# Altium PCB NBP-28 Rev 1.00.PCBDOC (part 6 of 6)
Units mil, origin at the board's own origin, x right, y up, seen from the top; angles counter-clockwise.
Board outline 2716.54 x 3917.15 mil, 8 copper layers (Top Layer, MidLayer3, MidLayer1, VCC, Gnd, VCCINT, MidLayer2, Bottom Layer), stack 59.043 mil thick; 229 components, 429 nets, 1584 pads, 1020 vias.
Unrouted connection lines stored in the file: 302.
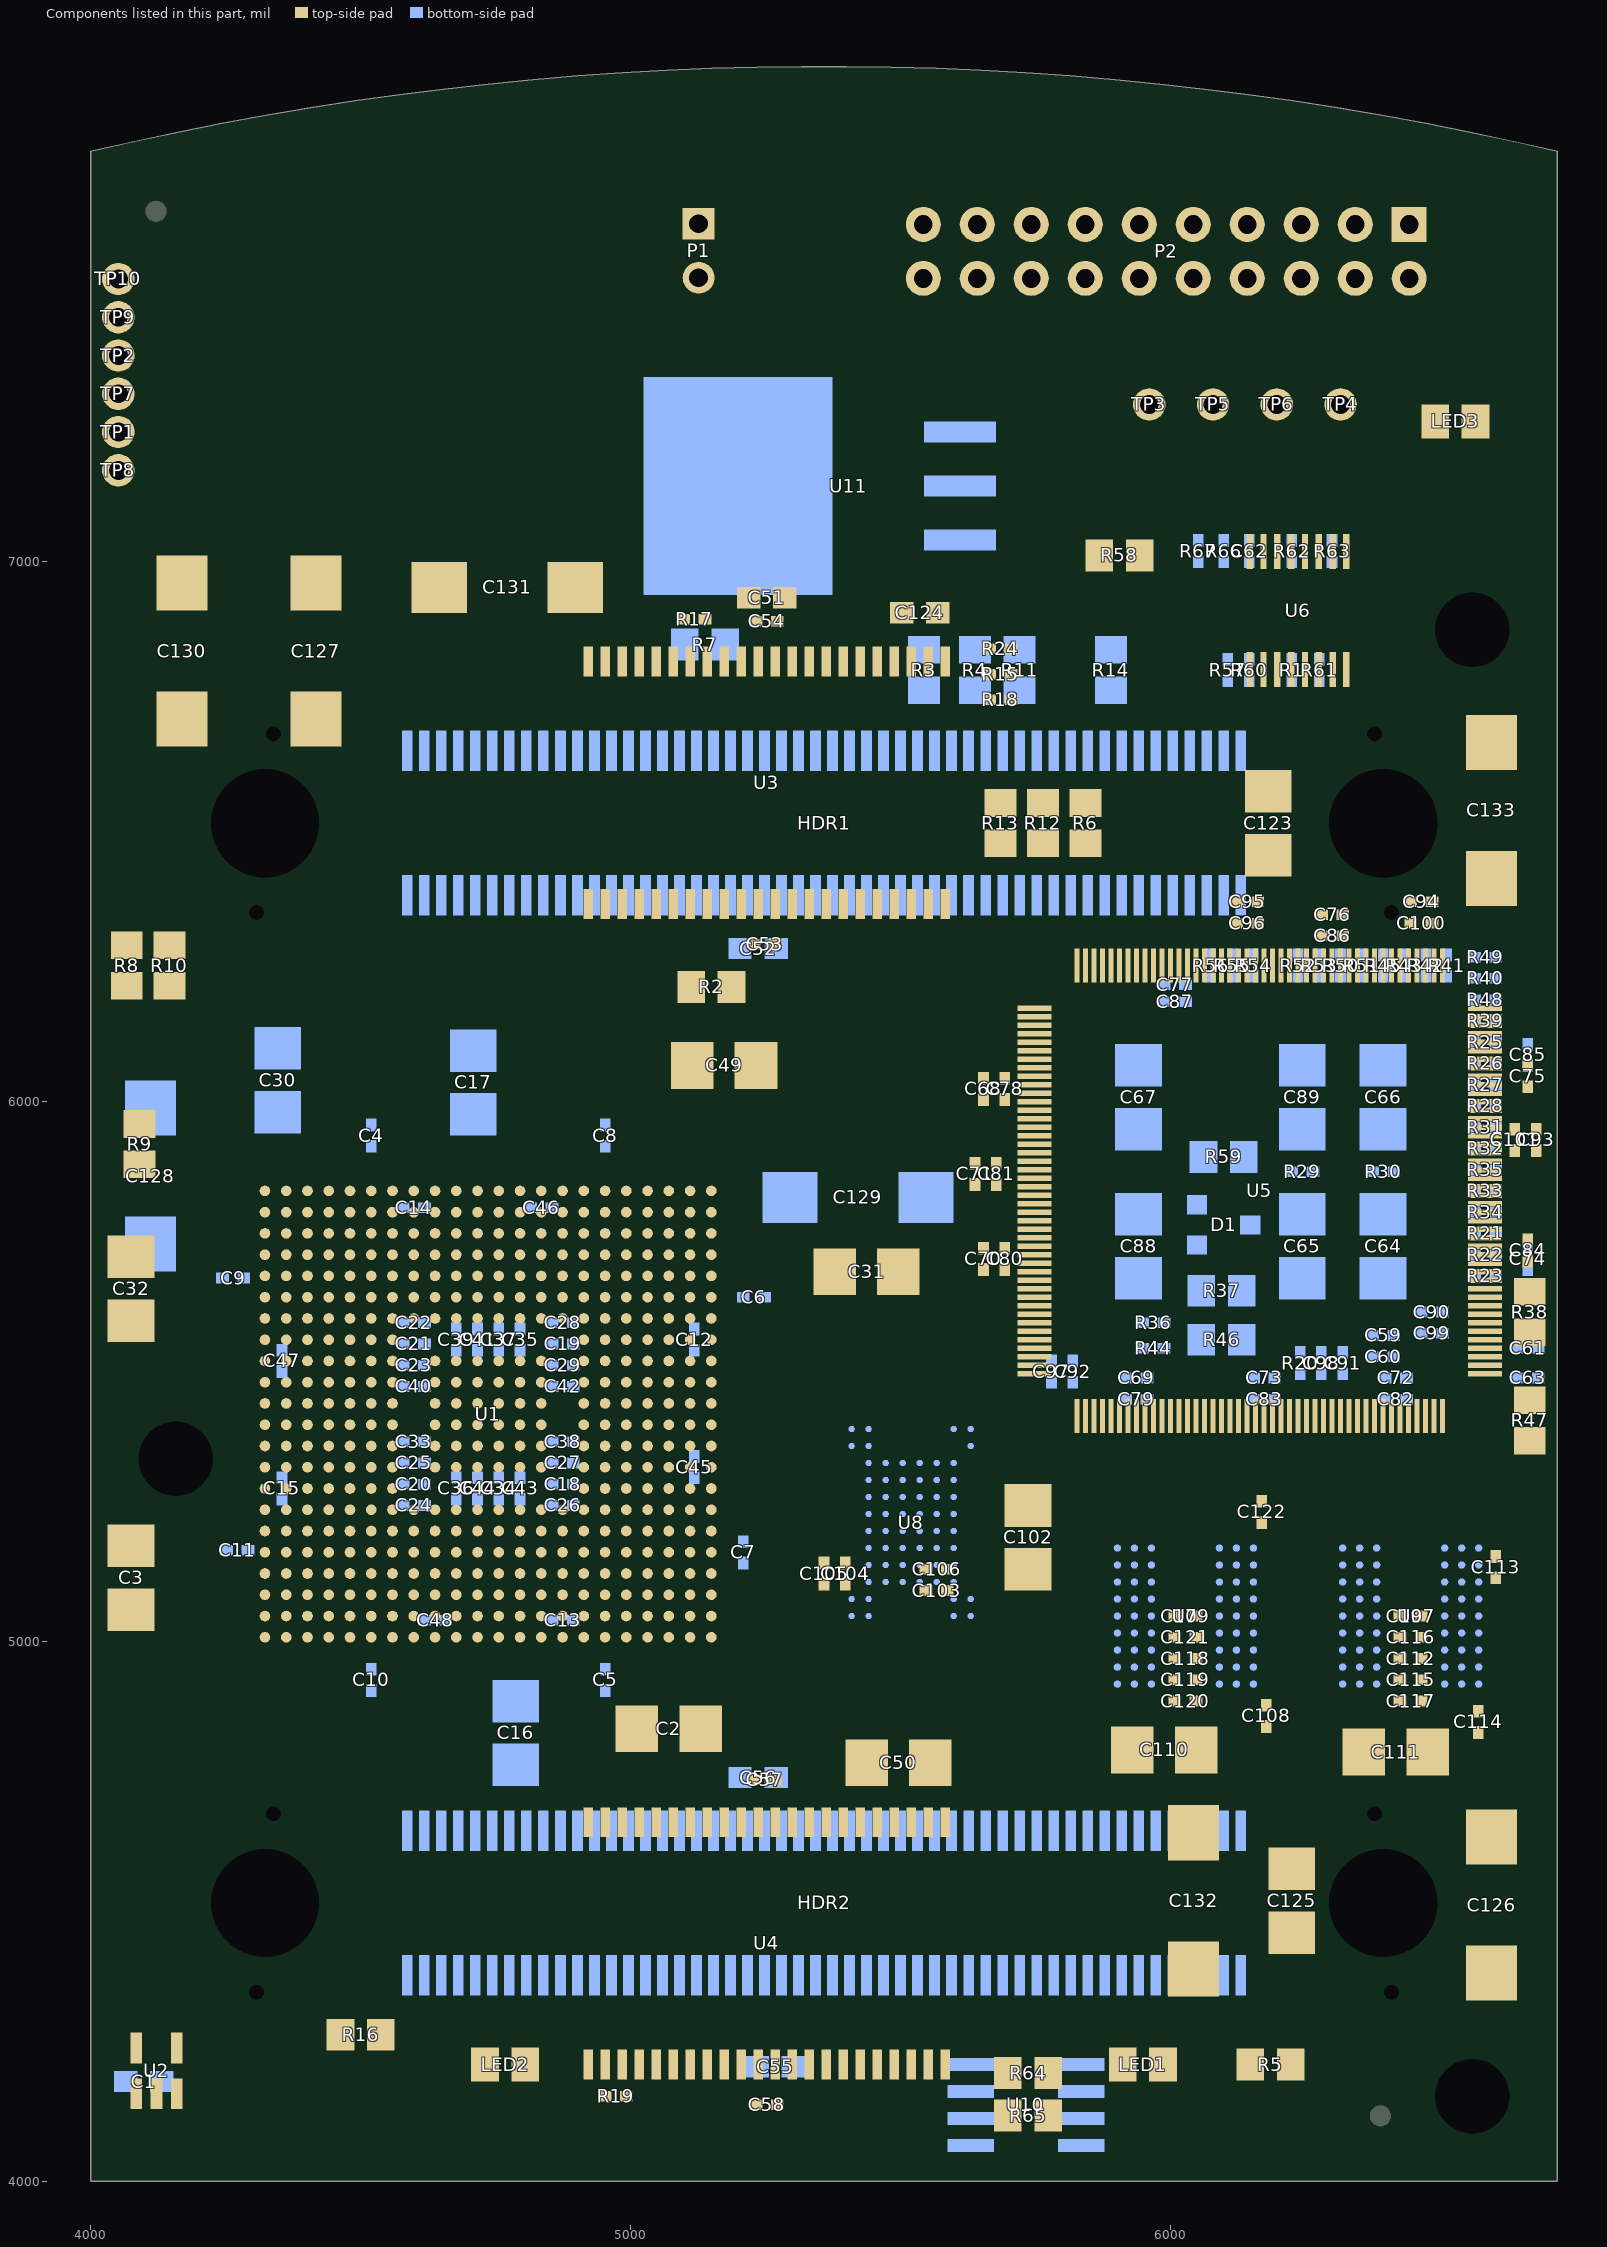
[diagram p12: the components of this part, seen from the top]

## Silkscreen, mask and mechanical layers (free items; w line width, h text height) (continued)
Design Information:
  drawing of 689 lines, arcs and shapes, not listed
  text "NBP28 Rev1.00" at 13407.17,10976.02 h50
  text "DESIGN INFORMATION" at 11202.17,10971.02 h60
  text "BOARD NAME:" at 12682.17,10971.02 h60
  text "BOARD TECHNOLOGY" at 11202.17,10871.02 h60
  text "BOARD SIZE (REFER ALSO PROFILING INFORMATION)" at 13102.17,10871.02 h50
  text "5.000" at 11285.67,10784.84 h60
  text "69.00mm" at 13209.25,10781.5 h60
  text "12.000" at 11821.8,10778.89 h60
  text "81.00mm" at 14114.76,10777.56 h60
  text "5.000" at 12374.17,10773.03 h60
  text "X" at 13837.17,10751.02 h70
  text "(MIN. TRACK/   PADS  /   CLEARANCE     IN 0.001'')" at 11142.17,10671.02 h50
  text "MINIMUM ANNULAR RING 0.125MM (0.005'') EXTERNAL PER IPC-2221 CLASS 3 LEVEL C AND IS THE" at 11202.17,10571.02 h50
  text "MANUFACTURING REGISTRATION ALLOWANCE" at 11202.17,10481.02 h50
  text "LAND SIZE CALCULATION MINIMUM - NOMINAL HOLE SIZE + 0.508MM (0.020'')" at 11202.17,10371.02 h50
  text "CIRCUIT TYPE:" at 11202.17,10191.02 h60
  text "SS" at 12102.17,10191.02 h50
  text "DS" at 12802.17,10191.02 h50
  text "X" at 13377.17,10191.02 h60
  text "PTH" at 13502.17,10191.02 h50
  text "ML" at 13932.17,10191.02 h50
  text "X" at 14082.17,10191.02 h60
  text "No. OF" at 14202.17,10191.02 h50
  text "8" at 14885.67,10184.84 h60
  text "FINGER CONNECTOR DIM PER:" at 11202.17,10071.02 h60
  text "AS SHOWN" at 14202.17,10071.02 h50
  text "No. OFF TOTAL" at 11862.17,9961.02 h60
  text "ONE SIDE" at 13502.17,9961.02 h50
  text "BOTH SIDES" at 14202.17,9951.02 h50
  text "VIAS:" at 11202.17,9846.02 h60
  text "NONE" at 11652.17,9846.02 h45
  text "X" at 11982.17,9846.02 h60
  text "FEED THRU'" at 12102.17,9846.02 h45
  text "TENTED" at 12802.17,9846.02 h45
  text "BURIED LAYER SEQUENCE" at 13502.17,9846.02 h45
  text "UNIQUE DRILL" at 12102.17,9726.02 h45
  text "2 SIZE" at 12802.17,9726.02 h45
  text "BLIND LAYER SEQUENCE" at 13502.17,9726.02 h45
  text "Layer Stack Manager (Protel)" at 12597.17,9636.02 h50
  text "X" at 14082.17,9636.02 h60
  text "AS SHOWN" at 14202.17,9636.02 h50
  text "LAYER CONSTRUCTION PER:" at 11202.17,9631.02 h60
  text "Protel" at 14392.17,9531.02 h50
  text "(PFW)" at 14797.17,9526.02 h50
  text "ARTWORK:" at 11202.17,9521.02 h60
  text "MANUAL" at 12102.17,9521.02 h50
  text "DIGITISED" at 12802.17,9521.02 h50
  text "X" at 13382.17,9521.02 h60
  text "CAD" at 13502.17,9521.02 h50
  text "TYPE" at 13932.17,9521.02 h50
  text "ARTWORK/PATTERN MASTER LIST" at 11202.17,9336.02 h60
  text "DESCRIPTION" at 11252.17,9241.02 h50
  text "DRAWING No./CAD FILE REF." at 11987.17,9241.02 h50
  text "LAYER NAME" at 13612.17,9241.02 h50
  text "GERBER FILE REF" at 14429.17,9238.03 h50
  text "PCB FILE" at 11192.17,9141.02 h50
  text "NBP28 Rev1.00" at 11993.7,9138.78 h50
  text "PcbDoc" at 13224.17,9138.03 h40
  text "Top Paste Mask" at 13546.18,9041.02 h40
  text "GTP" at 15224.17,9038.03 h50
  text "GERBER FILE" at 11192.17,9036.02 h50
  text "GTO" at 15222.17,8940.04 h50
  text "Top Overlay" at 13546.18,8939.02 h40
  text "GERBER FILE" at 11192.17,8936.02 h50
  text "Top Solder Mask" at 13546.18,8843.03 h40
  text "GTS" at 15224.17,8838.03 h50
  text "GERBER FILE" at 11192.17,8836.02 h50
  text "TOP LAYER" at 13546.18,8741.02 h40
  text "GTL" at 15224.17,8738.03 h50
  text "GERBER FILE" at 11192.17,8736.02 h50
  text "MIDLAYER3" at 13546.21,8641.09 h40
  text "G3" at 15219.43,8641.09 h50
  text "GERBER FILE" at 11192.17,8636.02 h50
  text "MIDLAYER1" at 13546.21,8542.67 h40
  text "G1" at 15219.43,8542.67 h50
  text "GERBER FILE" at 11192.17,8536.02 h50
  text "VCC" at 13546.18,8441.02 h40
  text "GERBER FILE" at 11192.17,8436.02 h50
  text "GP2" at 15224.17,8431.73 h50
  text "GND" at 13546.21,8345.82 h40
  text "GP1" at 15219.43,8345.82 h50
  text "GERBER FILE" at 11192.17,8336.02 h50
  text "VCCINT" at 13546.21,8247.39 h40
  text "GERBER FILE" at 11192.17,8236.02 h50
  text "GP3" at 15224.17,8234.88 h50
  text "MIDLAYER2" at 13546.21,8148.97 h40
  text "GERBER FILE" at 11192.17,8136.02 h50
  text "G2" at 15224.17,8136.46 h50
  text "BOTTOM LAYER" at 13546.18,8041.02 h40
  text "GBL" at 15224.17,8038.03 h50
  text "GERBER FILE" at 11192.17,8036.02 h50
  text "Bottom Solder Mask" at 13546.18,7943.03 h40
  text "GBS" at 15224.17,7938.03 h50
  text "GERBER FILE" at 11192.17,7936.02 h50
  text "Bottom Overlay" at 13546.18,7841.02 h40
  text "GBO" at 15224.17,7838.03 h50
  text "GERBER FILE" at 11192.17,7836.02 h50
  text "Bottom Paste Mask" at 13546.18,7743.03 h40
  text "GBP" at 15224.17,7738.03 h50
  text "GERBER FILE" at 11192.17,7736.02 h50
  text "PCB Boundary" at 13546.18,7641.02 h40
  text "GM1" at 15224.17,7638.03 h50
  text "GERBER FILE" at 11192.17,7636.02 h50
  text "Dimensions" at 13546.18,7541.02 h40
  text "GM4" at 15224.17,7538.03 h50
  text "GERBER FILE" at 11192.17,7536.02 h50
  text "APERTURE LIST" at 11192.17,7441.02 h50
  text "APR" at 13263.54,7438.03 h50
  text "DRILL REPORT" at 11192.17,7341.02 h50
  text "DRR" at 13263.54,7338.03 h50
  text "DRILL FILE" at 11181.69,7238.39 h50
  text "DRL" at 13258.62,7232.72 h50
  text "TXT" at 13252.56,7137.99 h50
  text "EXCELLON DRILL" at 11178.74,7135.04 h50
  text "MATERIAL:" at 11202.17,6931.02 h60
  text "GLASS FIBRE EPOXY RESIN NEMA GRADE FR4 (MIL-S-13949H)" at 12212.17,6921.02 h50
  text "X" at 12107.17,6916.02 h60
  text "THICKNESS:" at 11512.17,6806.02 h50
  text "0.8mm" at 12212.17,6806.02 h50
  text "1.2mm" at 12907.17,6806.02 h50
  text "1.6mm" at 13602.17,6806.02 h50
  text "2.4mm" at 14302.17,6806.02 h50
  text "3.2mm" at 15002.17,6806.02 h50
  text "X" at 13507.17,6801.02 h60
  text "TOLERANCE:" at 11507.17,6686.02 h50
  text "IN A/W IPC-D-300G CLASS" at 12202.17,6686.02 h50
  text "3 LEVEL B" at 13577.17,6686.02 h50
  text "OTHER +/-" at 14302.17,6686.02 h50
  text "X" at 12107.17,6681.02 h60
  text "BOW & TWIST:" at 11412.17,6566.02 h50
  text "IN A/W IPC-D-300G CLASS" at 12202.17,6566.02 h50
  text "3 LEVEL B" at 13577.17,6566.02 h50
  text "AS SHOWN" at 14307.17,6561.02 h50
  text "X" at 12107.17,6556.02 h60
  text "COPPER THICKNESS (FINISHED)" at 11507.17,6436.02 h50
  text "OUTER:" at 11697.17,6346.02 h50
  text "18um" at 12212.17,6346.02 h50
  text "35um" at 13277.17,6346.02 h50
  text "70um" at 14312.17,6346.02 h50
  text "X" at 13169.17,6338.03 h60
  text "INNER SIGNAL:" at 11367.17,6226.02 h50
  text "18um" at 12212.17,6226.02 h50
  text "35um" at 13277.17,6226.02 h50
  text "70um" at 14312.17,6226.02 h50
  text "X" at 13167.17,6218.03 h60
  text "INNER PWR:" at 11512.17,6106.02 h50
  text "18um" at 12212.17,6106.02 h50
  text "35um" at 13277.17,6106.02 h50
  text "70um" at 14312.17,6106.02 h50
  text "X" at 13172.17,6101.02 h60
  text "STRUCTURE:" at 11202.17,5986.02 h60
  text "REFER" at 12212.17,5986.02 h50
  text "AS PER DRAWING No." at 12207.17,5861.02 h50
  text "AS SHOWN" at 14307.17,5861.02 h50
  text "X" at 14207.17,5856.02 h60
  text "DRILLING:" at 11202.17,5751.02 h60
  text "VIEWED FROM:" at 11397.17,5661.02 h50
  text "COMPONENT SIDE" at 12212.17,5661.02 h45
  text "SOLDER SIDE" at 13267.17,5661.02 h45
  text "X" at 12107.17,5651.02 h60
  text "REFERENCE:" at 11487.17,5541.02 h50
  text "AS SHOWN" at 12207.17,5536.02 h45
  text "PATTERN MASTER LIST" at 13272.17,5536.02 h45
  text "X" at 14207.17,5536.02 h60
  text "NC_DRILL FILES" at 14307.17,5536.02 h45
  text "X" at 12107.17,5531.02 h60
  text "PTH MINIMUM COPPER THICKNESS:" at 11717.17,5421.02 h50
  text "20um" at 13277.17,5421.02 h50
  text "X" at 13172.17,5416.02 h60
  text "OTHER" at 14307.17,5416.02 h50
  text "NPTH:" at 11737.17,5301.02 h50
  text "TENTED" at 12207.17,5296.02 h45
  text "X" at 13172.17,5296.02 h60
  text "PADS REMOVED" at 13272.17,5296.02 h45
  text "REMOVE PADS" at 14307.17,5296.02 h45
  text "X" at 12107.17,5291.02 h60
  text "2nd DRILL" at 12207.17,5176.02 h45
  text "BOTH" at 13272.17,5176.02 h45
  text "AS SHOWN" at 13757.17,5176.02 h45
  text "NONE" at 14307.17,5176.02 h45
  text "BOARD FINISH:" at 11202.17,5061.02 h60
  text "X" at 12107.17,5056.02 h60
  text "ETCHING" at 12207.17,5056.02 h45
  text "REFER PATTERN MASTER LIST" at 13272.17,5056.02 h45
  text "LEGEND / SCREEN PRINT:" at 12002.17,4941.02 h50
  text "NONE" at 13272.17,4936.02 h45
  text "COMPONENT" at 13757.17,4936.02 h45
  text "SOLDER" at 14307.17,4936.02 h45
  text "X" at 13657.17,4931.02 h60
  text "X" at 14207.17,4931.02 h60
  text "COLOUR:" at 11617.17,4821.02 h50
  text "WHITE" at 12207.17,4816.02 h45
  text "YELLOW" at 13272.17,4816.02 h45
  text "OTHER" at 14307.17,4816.02 h45
  text "X" at 12107.17,4811.02 h60
  text "X" at 12107.17,4696.02 h60
  text "LIQUID PHOTOIMAGEABLE" at 12207.17,4696.02 h45
  text "SCREEN PRINT" at 13757.17,4696.02 h45
  text "MATTE" at 12207.17,4576.02 h45
  text "GLOSS" at 12707.17,4576.02 h45
  text "GREEN" at 13272.17,4576.02 h45
  text "BLUE" at 13757.17,4576.02 h45
  text "G/Y" at 14307.17,4576.02 h45
  text "OTHER" at 14757.17,4576.02 h45
  text "X" at 12602.17,4571.02 h60
  text "SOLDER MASK COLOUR:" at 11202.17,4461.02 h45
  text "BLACK" at 12207.17,4456.02 h45
  text "GREEN" at 12707.17,4456.02 h45
  text "YELLOW" at 13272.17,4456.02 h45
  text "BLUE" at 13757.17,4456.02 h45
  text "OTHER" at 14307.17,4456.02 h45
  text "X" at 12102.17,4451.02 h60
  text "TRACK FINISH:" at 11202.17,4341.02 h60
  text "SELECTIVE SOLDER (HASL)" at 12207.17,4336.02 h45
  text "REFLOW SOLDER" at 13757.17,4336.02 h45
  text "SELECTIVE GOLD" at 12207.17,4216.02 h45
  text "um  (AREA" at 13272.17,4216.02 h45
  text "sq. mm)" at 14367.17,4216.02 h45
  text "X" at 12101.97,4096.46 h60
  text "IMMERSION GOLD" at 12207.17,4096.02 h45
  text "OTHER" at 13757.17,4096.02 h45
  text "EDGE BOARD" at 11202.17,3981.02 h60
  text "1.3um HARD GOLD OVER 5um     NICKEL / TIN-NICKEL" at 12207.17,3976.02 h45
  text "CONTACTS:" at 11202.17,3896.02 h60
  text "HARD FINISH GOLDE PLATE" at 12207.17,3856.02 h45
  text "OTHER" at 13757.17,3856.02 h45
  text "AS SHOWN" at 12207.17,3736.02 h45
  text "REFER" at 13757.17,3736.02 h45
  text "PROFILING:" at 11202.17,3616.02 h60
  text "AS DIMENSIONED, MEASURED AND CUT FROM SPECIFIED DATUM." at 12207.17,3616.02 h45
  text "X" at 12107.17,3611.02 h60
  text "REFER PCB BLANK DWG No." at 12212.17,3501.02 h50
  text "USE PROFILE / ROUTE TAPE SUPPLIED (REFER PATTERN MASTER LIST)" at 12212.17,3381.02 h50
  text "SQUARE CUT" at 12212.17,3261.02 h50
  text "N.C. ROUTE" at 12912.17,3261.02 h50
  text "V. SCORE" at 13612.17,3261.02 h50
  text "BLANK" at 14312.17,3261.02 h50
  text "ACCEPTABILITY:" at 11202.17,3156.02 h60
  text "MATERIALS AND WORKMANSHIP FOR ALL PRINTED WIRING BOARDS TO MEET" at 12077.17,3151.02 h50
  text "OR EXCEED THE REQUIREMENTS OF:" at 12077.17,3041.02 h50
  text "IPC-6011/12 AND IPC-A-600E" at 12217.17,2936.02 h50
  text "1" at 13617.17,2936.02 h50
  text "2" at 13967.17,2936.02 h50
  text "X" at 13862.17,2931.02 h60
  text "X" at 12112.17,2926.02 h60
  text "3" at 14317.17,2851.02 h50
  text "UL CERTIFICATION" at 12217.17,2816.02 h50
  text "AUSTEL" at 13617.17,2816.02 h50
  text "X" at 12112.17,2811.02 h60
  text "ML-P-55110F GRP" at 12197.17,2696.02 h40
  text "A" at 12917.17,2696.02 h50
  text "B" at 13267.17,2696.02 h50
  text "AS2546" at 13617.17,2696.02 h50
  text "OTHER" at 14317.17,2696.02 h50
  text "ADDITIONAL" at 11202.17,2581.02 h60
  text "NONE" at 12217.17,2571.02 h50
  text "SAMPLE PLAN" at 12917.17,2571.02 h50
  text "MIL-P-55110E SERIAL Nos. PER ORDER" at 13617.17,2571.02 h50
  text "REQUIREMENTS:" at 11202.17,2486.02 h60
  text "NONE" at 12217.17,2451.02 h50
  text "X" at 12807.68,2444.88 h60
  text "QUALITY RELEASE REPORT" at 12911.26,2442.24 h50
  text "X" at 12808.43,2326.1 h60
  text "OTHER" at 12911.02,2323.82 h50
  text "MICROSECTION SAMPLE REQUIRED" at 13210.24,2323.82 h50
  text "NONE" at 12917.17,2211.02 h50
  text "REQUIRED" at 13617.17,2211.02 h50
  text "PER ORDER" at 14517.17,2211.02 h50
  text "ELECTRICAL TEST:" at 11202.17,2206.02 h60
  text "X" at 13512.17,2206.02 h60
  text "NONE" at 12917.17,2091.02 h50
  text "1 SIDE" at 13612.17,2091.02 h45
  text "2 SIDES" at 14052.17,2091.02 h45
  text "MIN. PITCH" at 14512.17,2091.02 h50
  text "0.5mm" at 15047.17,2091.02 h50
  text "SURFACE MOUNT:" at 11202.17,2086.02 h60
  text "X" at 13964.17,2083.03 h60
  text "NONE" at 12917.17,1971.02 h50
  text "FOIL" at 13617.17,1971.02 h50
  text "LEGEND" at 14067.17,1971.02 h50
  text "REFER" at 14512.17,1971.02 h50
  text "X" at 13961.22,1969.49 h60
  text "MANUFACTURER'S ID/LOGO:" at 11202.17,1966.02 h60
  text "ISO9001/AS3901" at 13067.17,1851.02 h50
  text "NONE" at 14512.17,1851.02 h50
  text "MANUFACTURER'S ACCREDITATION:" at 11202.17,1846.02 h60
  text "X" at 12962.17,1846.02 h60
  text "PER ORDER" at 12917.17,1731.02 h50
  text "REFER" at 13617.17,1731.02 h50
  text "PACKAGING AND HANDLING:" at 11202.17,1726.02 h60
  text "X" at 12812.17,1721.02 h60
Sheet:
  drawing of 1883 lines, arcs and shapes, not listed
  text "1" at 1146.34,11165 h31.5
  text "2" at 3077,11165 h31.5
  text "3" at 5016.34,11165 h31.5
  text "4" at 6957,11165 h31.5
  text "5" at 8897,11165 h31.5
  text "6" at 10827,11165 h31.5
  text "7" at 12777,11165 h31.5
  text "8" at 14707,11165 h31.5
  text "A" at 275,9827 h31.5
  text "A" at 15575,9827 h31.5
  text "B" at 275,7047 h31.5
  text "B" at 15575,7047 h31.5
  text "C" at 275,4267 h31.5
  text "C" at 15575,4267 h31.5
  text "D" at 275,1507 h31.5
  text "D" at 15575,1507 h31.5
  text "ENGINEER:" at 11050,1500 h31.5
  text "TITLE:" at 12550,1500 h31.5
  text "PCB DESIGNER:" at 11050,1205 h31.5
  text "PART NO.:" at 12550,1200 h31.5
  text "REV:" at 14650,1200 h31.5
  text "DATE:" at 11050,900 h31.5
  text "DWG NO:" at 12550,900 h31.5
  text "SCALE:" at 14650,900 h31.5
  text "Altium Limited" at 9750,800 h31.5
  text ".PRINT_DATE" at 11100,780 h31.5
  text "12a Rodborough Rd" at 9750,700 h31.5
  text "Frenchs Forest" at 9750,600 h31.5
  text "FILE NAME:" at 11050,600 h31.5
  text "NSW 2086" at 9750,500 h31.5
  text ".PCB_FILE_NAME_NO_PATH" at 11100,480 h31.5
  text "1" at 1146.34,265 h31.5
  text "2" at 3077,265 h31.5
  text "3" at 5016.34,265 h31.5
  text "4" at 6957,265 h31.5
  text "5" at 8897,265 h31.5
  text "6" at 10827,265 h31.5
  text "7" at 12777,265 h31.5
  text "8" at 14707,265 h31.5
Drill Drawing:
  text ".Legend" at 3996.06,3106.3 h31.5

## Dimensions
5358.27,1980.29 to 5618.11,7389.76 on Dimensions
4000,4000 to 4000.02,7759.84 on Dimensions
4000,4000 to 6716.54,4000 on Dimensions

## Text inside footprints (layer, text, board x,y; h text height)
P2: Top Overlay "2" at 6503.94,7500 h59.06; Top Overlay "1" at 6511.81,7594.49 h59.06; Top Overlay "20" at 5389.77,7500 h59.06; Top Overlay "19" at 5393.7,7594.49 h59.06
U3: Mechanical 15 "10.0" at 4964.57,6543.31 h35.43 r90; Mechanical 15 "12.8" at 4881.89,6543.31 h35.43 r90
U4: Mechanical 15 "10.0" at 4964.57,4393.7 h35.43 r90; Mechanical 15 "12.8" at 4881.89,4393.7 h35.43 r90
U11: Bottom Overlay "1" at 5787.4,7224.41 h31.5; Bottom Overlay "3" at 5799.21,7027.56 h31.5; Bottom Overlay "2" at 5795.28,7125.98 h31.5